# Altium PCB testboard_kit_tt.PcbDoc
Units mm, origin at the board's own origin, x right, y up, seen from the top; angles counter-clockwise.
Board outline 33.02 x 59.94 mm, 2 copper layers (Top Layer, Bottom Layer); 27 components, 7 nets, 91 pads, 413 vias.
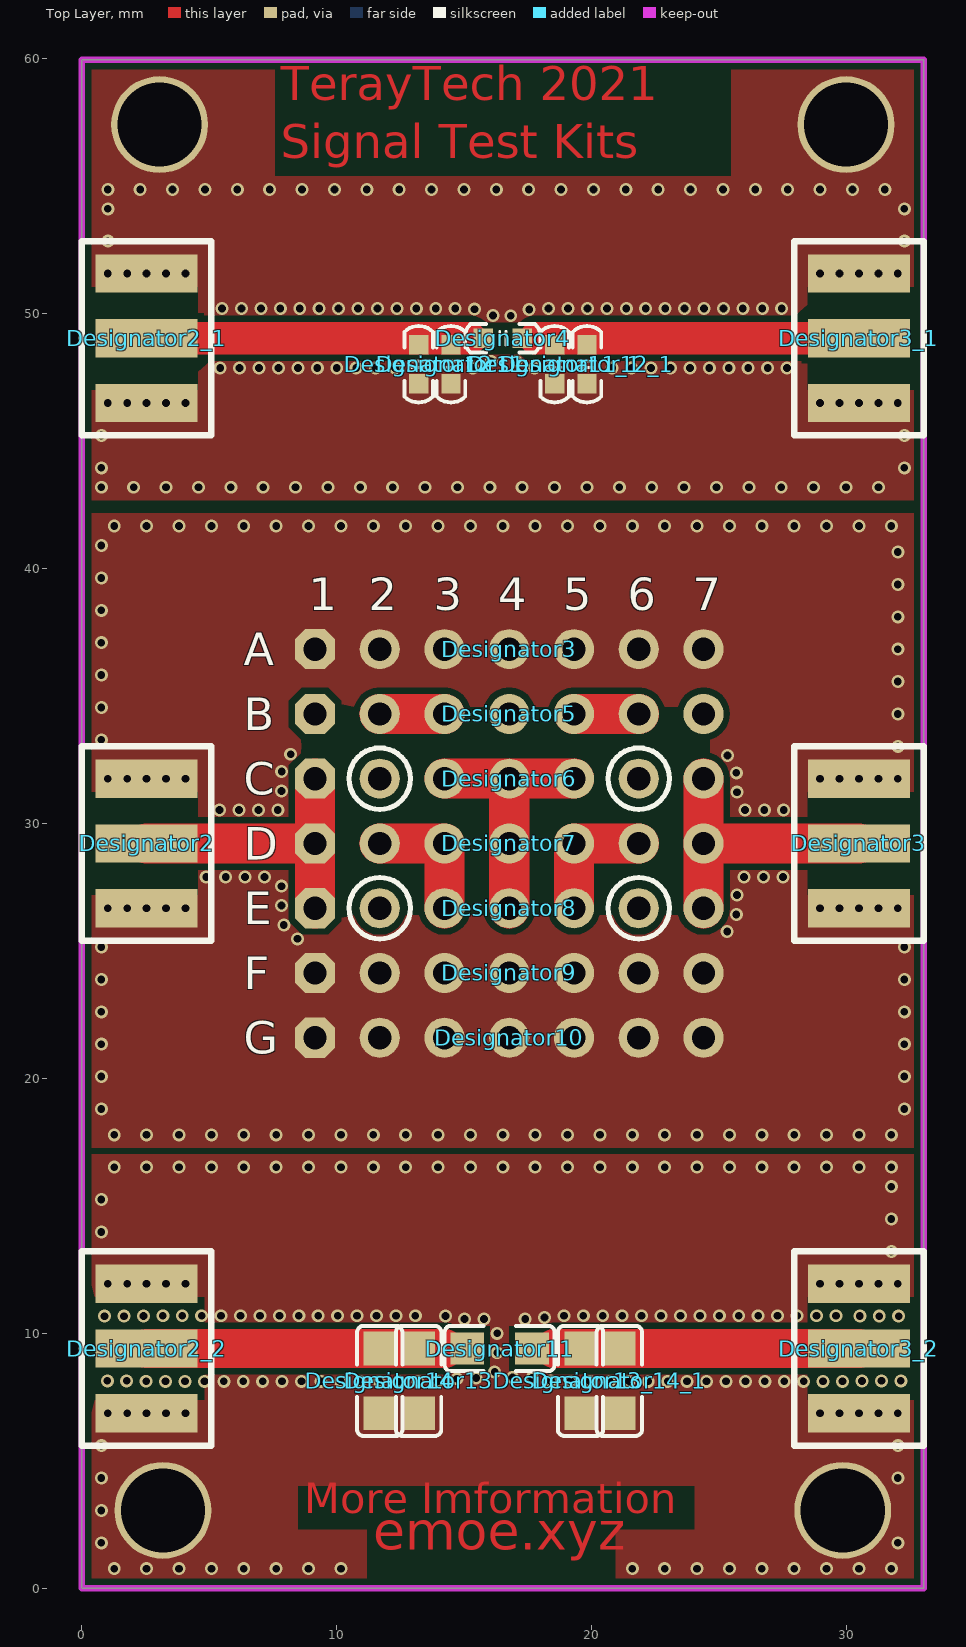
[diagram p0: Top Layer view]
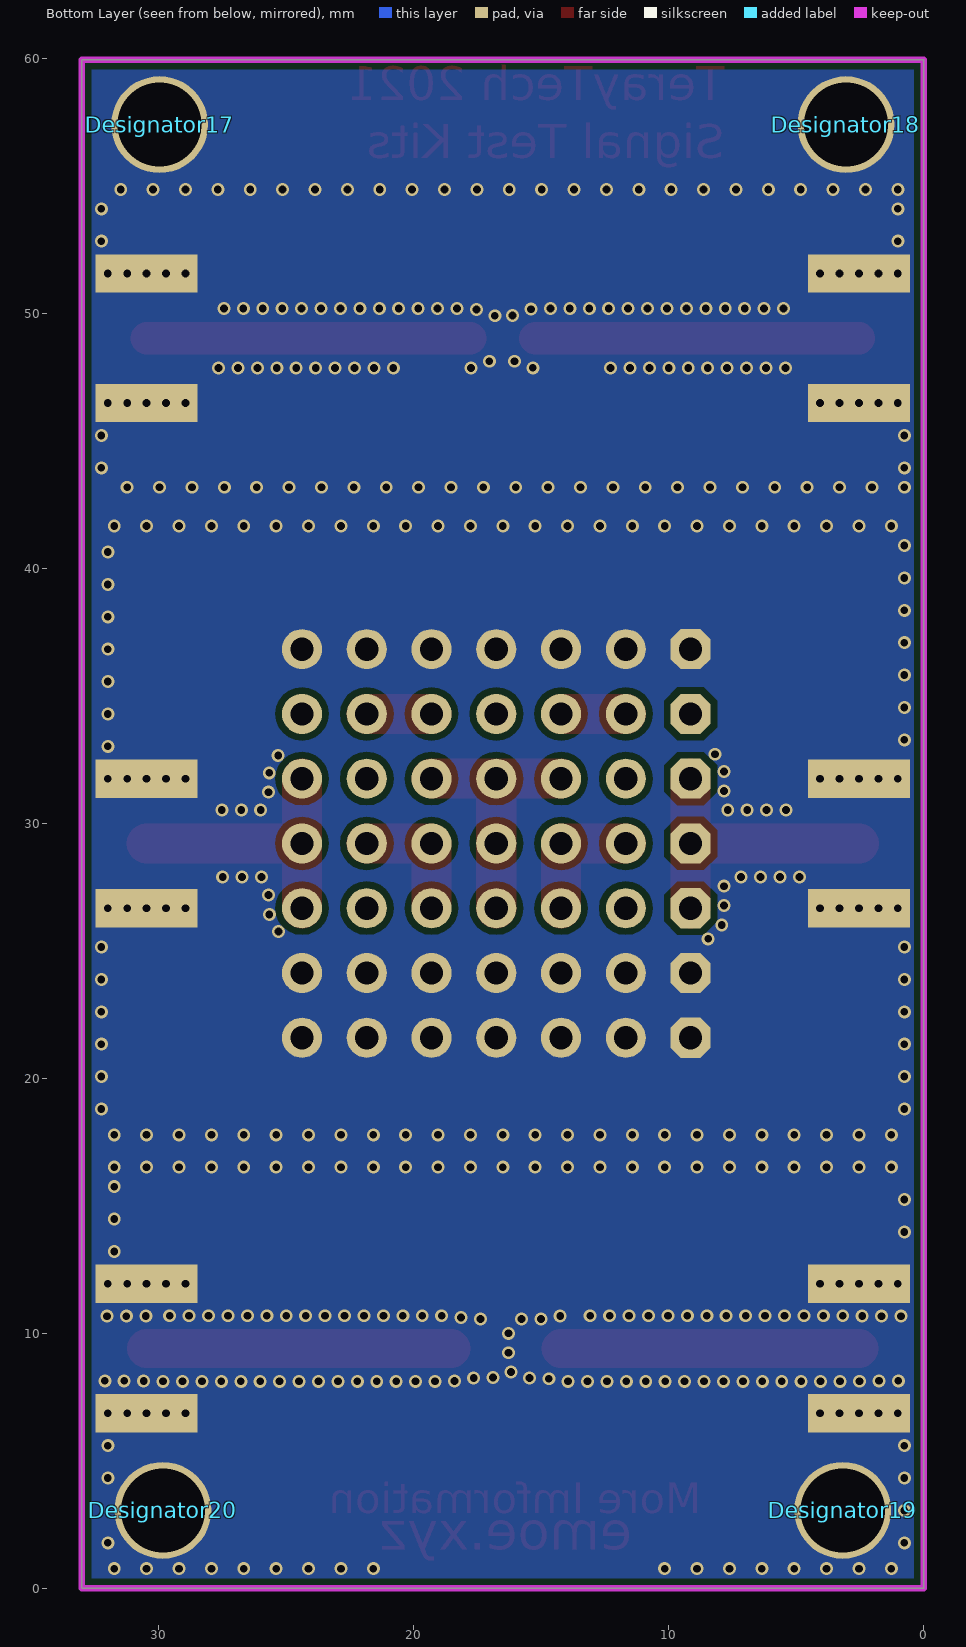
[diagram p1: Bottom Layer view, seen from below]
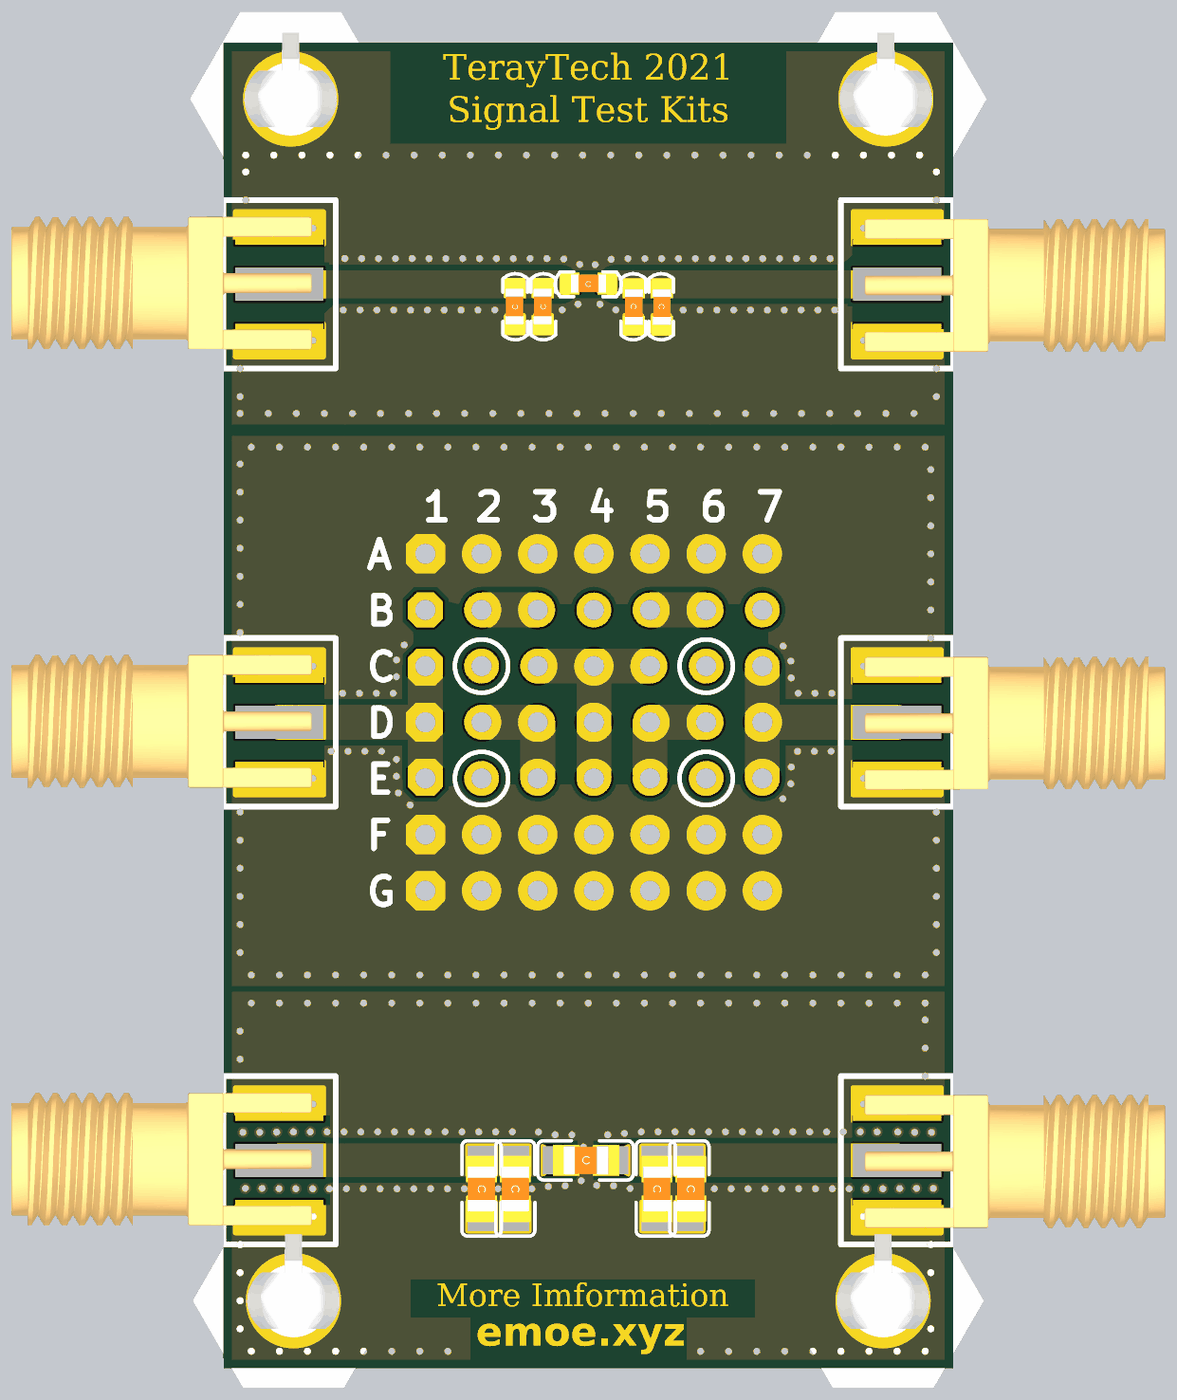
[diagram p2: 3D render of the assembled board from above, using the file's embedded part models]

## Layer stack, top to bottom
Top Solder: solder mask 0.0102, Solder Resist, Dk 3.5
Top Layer: signal copper 0.0356
Dielectric 1: dielectric 0.32, FR-4, Dk 4.8
Bottom Layer: signal copper 0.0356
Bottom Solder: solder mask 0.0102, Solder Resist, Dk 3.5

## Board outline
0,0 33.02,0 33.02,59.944 0,59.944

## Design rules (kind name [scope] priority, off if disabled: settings)
Clearance [All] p1: gap=0.254 ignorepadtopadclearanceinfootprint=FALSE except(0: Arc-Hole Track-Hole SMDPad-Hole THPad-Hole Via-Hole Fill-Hole Poly-Hole Region-Hole Text-Hole)
ComponentClearance [All] p1 off: gap=0.254 collisioncheckmode=3 verticalgap=0.254 showdistances=FALSE
PolygonConnect [All] p1: connectstyle=Direct reliefconductorwidth=0.254 reliefentries=4 polygonreliefangle="90 Angle" airgapwidth=0.254
RoutingVias [All] p1: holewidth=0.711 width=1.27 viastyle="Through Hole" minholewidth=0.305 minwidth=0.508 maxholewidth=0.711 maxwidth=1.27
SolderMaskExpansion [All] p1: expansion=0.102 istentingtop=FALSE
Width [All] p1: maxlimit=2.54 minlimit=0.254 preferedwidth=0.254 minimp=50.000000 maximp=50.000000 favimp=50.000000
29 further rules are at their usual default settings.

## Components (designator, comment, footprint, x,y, rotation, side; value= is the part's Value field where it differs from the comment)
Designator2 "Comment" SMA-2 2.54,29.21 r270 top locked
Designator2_1 "Comment" SMA-2 2.54,49.022 r270 top locked
Designator2_2 "Comment" SMA-2 2.54,9.398 r270 top locked
Designator3 "Comment" "header7 - smaller pad" 9.144,36.83 r0 top
Designator3 "Comment" SMA-2 30.48,29.21 r90 top locked
Designator3_1 "Comment" SMA-2 30.48,49.022 r90 top locked
Designator3_2 "Comment" SMA-2 30.48,9.398 r90 top locked
Designator4 "Comment" 0603_C 16.51,49.022 r0 top
Designator5 "Comment" "header7 - smaller pad" 9.144,34.29 r0 top
Designator6 "Comment" "header7 - smaller pad" 9.144,31.75 r0 top
Designator7 "Comment" "header7 - smaller pad" 9.144,29.21 r0 top
Designator8 "Comment" "header7 - smaller pad" 9.144,26.67 r0 top
Designator9 "Comment" "header7 - smaller pad" 9.144,24.13 r0 top
Designator10 "Comment" "header7 - smaller pad" 9.144,21.59 r0 top
Designator11 "Comment" 0805_c 15.24,9.398 r0 top
Designator11 "Comment" 0603_C 14.478,48.006 r90 top
Designator11_1 "Comment" 0603_C 18.542,48.006 r90 top
Designator12 "Comment" 0603_C 13.208,48.006 r90 top
Designator12_1 "Comment" 0603_C 19.812,48.006 r90 top
Designator13 "Comment" 0805_c 13.208,9.271 r270 top
Designator13_1 "Comment" 0805_c 19.558,9.271 r270 top
Designator14 "Comment" 0805_c 11.684,9.271 r270 top
Designator14_1 "Comment" 0805_c 21.082,9.271 r270 top
Designator17 "Comment" TCBS-6-01 29.972,57.404 r0 bottom
Designator18 "Comment" TCBS-6-01 3.048,57.404 r0 bottom
Designator19 "Comment" TCBS-6-01 3.175,3.048 r0 bottom
Designator20 "Comment" TCBS-6-01 29.845,3.048 r0 bottom

## Footprints (in the part's own frame and the unit in brackets; to place one, negate y for a bottom-side part, rotate by r counter-clockwise, add the part's x,y. Pads: shape width x height; smd on the part's side, far side on the other; paste and mask are expansions set on the pad)
0603_C [mil] "Capacitor"
  rect 30x30 smd: 1(-30,0) 2(30,0)
  silkscreen extent -59,-22 59,22, body extent -51,-18 52,21, height 35
0805_c [mil]
  rect 52x50 smd: 1(-5,0) 2(95,0)
  silkscreen extent -40,-35 130,35, body extent -13,-28 105,28, height 37
"header7 - smaller pad" [mm]
  oct 1.575x1.575 hole 0.914: 1(0,0)
  round 1.575 hole 0.914: 2(2.54,0) 3(5.08,0) 4(7.62,0) 5(10.16,0) 6(12.7,0) 7(15.24,0)
SMA-2 [mm]
  rect 1.5x4 all layers, no hole: 1(-2.54,0) 1(2.54,0)
  rect 1.5x4 smd: 2(0,0)
  silkscreen extent -3.81,-2.54 3.81,2.54, body extent -3.05,-12.13 2.95,1.47, height 3.2
TCBS-6-01 [mm] "Richco Plastics"
  round 3.8 hole 3.3 unplated mask+0.254: ""(0,0)
  body extent -4.56,-3.95 4.56,3.95, height 9.52

## Via types
v1: diameter 0.508, hole 0.305, Top Layer to Bottom Layer, tented both sides, 413 vias

## Nets (pads, with @x,y where several pads share a name; then routed paths per layer and width w, separated by ;. In a path a pad name is that pad's centre, name@x,y a point inside that pad or via, vN(x,y) a via of type N, cw(c..) or ccw(c..) an arc to the next point about the centre after c; other vN are vias at no path point)
GND: Designator2.1 Designator2_1.1 Designator2_2.1 Designator3.1 Designator3.2@11.684,36.83 Designator3.3 Designator3.4 Designator3.5 Designator3.6 Designator3.7 Designator3_1.1 Designator3_2.1 Designator9.1 Designator9.2 Designator9.3 Designator9.4 Designator9.5 Designator9.6 Designator9.7 Designator10.1 Designator10.2 Designator10.3 Designator10.4 Designator10.5 Designator10.6 Designator10.7 Designator11.1@14.478,47.244 Designator11_1.1 Designator12.1 Designator12_1.1 Designator13.2 Designator13_1.2 Designator14.2 Designator14_1.2 Designator17. Designator18. Designator19. Designator20.
  other v1: 1.27,0.762 2.54,0.762 3.81,0.762 5.08,0.762 6.35,0.762 7.62,0.762 8.89,0.762 10.16,0.762 21.59,0.762 22.86,0.762 24.13,0.762 25.4,0.762 26.67,0.762 27.94,0.762 29.21,0.762 30.48,0.762 31.75,0.762 0.762,1.778 32.004,1.778 0.762,3.048 0.762,4.318 32.004,4.318 0.762,5.588 32.004,5.588 1.016,6.858 1.778,6.858 2.54,6.858 3.302,6.858 4.064,6.858 28.956,6.858 29.718,6.858 30.48,6.858 31.242,6.858 32.004,6.858 3.283,8.111 4.045,8.111 4.807,8.111 5.569,8.111 6.331,8.111 7.093,8.111 7.855,8.111 8.617,8.111 9.379,8.111 10.141,8.111 10.903,8.111 11.665,8.111 12.427,8.111 13.189,8.111 13.951,8.111 19.167,8.111 19.929,8.111 20.691,8.111 21.453,8.111 22.215,8.111 22.977,8.111 23.739,8.111 24.501,8.111 25.263,8.111 26.025,8.111 26.787,8.111 27.549,8.111 28.311,8.111 29.073,8.111 29.835,8.111 0.997,8.13 1.759,8.13 2.521,8.115 18.405,8.125 30.597,8.122 31.359,8.13 32.121,8.13 14.706,8.212 15.467,8.245 16.891,8.265 17.653,8.245 16.193,8.477 16.291,9.232 16.291,9.994 15.009,10.551 15.771,10.551 17.389,10.551 18.148,10.62 0.889,10.666 1.651,10.666 2.413,10.672 14.258,10.678 30.514,10.678 31.275,10.666 32.037,10.666 3.175,10.685 3.937,10.685 4.699,10.685 5.461,10.685 6.223,10.685 6.985,10.685 7.747,10.685 8.509,10.685 9.271,10.685 10.033,10.685 10.795,10.685 11.557,10.685 12.319,10.685 13.081,10.685 18.908,10.685 19.67,10.685 20.432,10.685 21.194,10.685 21.956,10.685 22.718,10.685 23.48,10.685 24.242,10.685 25.004,10.685 25.766,10.685 26.528,10.685 27.29,10.685 28.052,10.685 28.814,10.685 29.576,10.685 1.016,11.938 1.778,11.938 2.54,11.938 3.302,11.938 4.064,11.938 28.956,11.938 29.718,11.938 30.48,11.938 31.242,11.938 32.004,11.938 31.75,13.208 0.762,13.97 31.75,14.478 0.762,15.24 31.75,15.748 1.27,16.51 2.54,16.51 3.81,16.51 5.08,16.51 6.35,16.51 7.62,16.51 8.89,16.51 10.16,16.51 11.43,16.51 12.7,16.51 13.97,16.51 15.24,16.51 16.51,16.51 17.78,16.51 19.05,16.51 20.32,16.51 21.59,16.51 22.86,16.51 24.13,16.51 25.4,16.51 26.67,16.51 27.94,16.51 29.21,16.51 30.48,16.51 31.75,16.51 1.27,17.78 2.54,17.78 3.81,17.78 5.08,17.78 6.35,17.78 7.62,17.78 8.89,17.78 10.16,17.78 11.43,17.78 12.7,17.78 13.97,17.78 15.24,17.78 16.51,17.78 17.78,17.78 19.05,17.78 20.32,17.78 21.59,17.78 22.86,17.78 24.13,17.78 25.4,17.78 26.67,17.78 27.94,17.78 29.21,17.78 30.48,17.78 31.75,17.78 0.762,18.796 32.258,18.796 0.762,20.066 32.258,20.066 0.762,21.336 32.258,21.336 0.762,22.606 32.258,22.606 0.762,23.876 32.258,23.876 0.762,25.146 32.258,25.146 8.454,25.469 25.312,25.754 7.921,26.014 25.669,26.427 1.016,26.67 1.778,26.67 2.54,26.67 3.302,26.67 4.064,26.67 28.956,26.67 29.718,26.67 30.48,26.67 31.242,26.67 32.004,26.67 7.832,26.771 25.696,27.188 7.832,27.533 4.877,27.898 5.639,27.898 6.401,27.898 7.163,27.898 25.974,27.898 26.736,27.898 27.498,27.898 5.4,30.522 6.162,30.522 6.924,30.522 7.686,30.522 26.005,30.522 26.767,30.522 27.529,30.522 25.696,31.219 7.832,31.27 1.016,31.75 1.778,31.75 2.54,31.75 3.302,31.75 4.064,31.75 28.956,31.75 29.718,31.75 30.48,31.75 31.242,31.75 32.004,31.75 25.67,31.98 7.839,32.032 25.322,32.658 8.189,32.709 32.004,33.02 0.762,33.274 32.004,34.29 0.762,34.544 32.004,35.56 0.762,35.814 32.004,36.83 0.762,37.084 32.004,38.1 0.762,38.354 32.004,39.37 0.762,39.624 32.004,40.64 0.762,40.894 1.27,41.656 2.54,41.656 3.81,41.656 5.08,41.656 6.35,41.656 7.62,41.656 8.89,41.656 10.16,41.656 11.43,41.656 12.7,41.656 13.97,41.656 15.24,41.656 16.51,41.656 17.78,41.656 19.05,41.656 20.32,41.656 21.59,41.656 22.86,41.656 24.13,41.656 25.4,41.656 26.67,41.656 27.94,41.656 29.21,41.656 30.48,41.656 31.75,41.656 0.762,43.18 2.032,43.18 3.302,43.18 4.572,43.18 5.842,43.18 7.112,43.18 8.382,43.18 9.652,43.18 10.922,43.18 12.192,43.18 13.462,43.18 14.732,43.18 16.002,43.18 17.272,43.18 18.542,43.18 19.812,43.18 21.082,43.18 22.352,43.18 23.622,43.18 24.892,43.18 26.162,43.18 27.432,43.18 28.702,43.18 29.972,43.18 31.242,43.18 0.762,43.942 32.258,43.942 0.762,45.212 32.258,45.212 1.016,46.482 1.778,46.482 2.54,46.482 3.302,46.482 4.064,46.482 28.956,46.482 29.718,46.482 30.48,46.482 31.242,46.482 32.004,46.482 5.425,47.857 6.187,47.857 6.949,47.857 7.711,47.857 8.473,47.857 9.235,47.857 9.997,47.857 10.759,47.857 11.521,47.857 12.283,47.857 17.754,47.862 20.802,47.857 21.564,47.857 22.326,47.857 23.088,47.857 23.85,47.857 24.612,47.857 25.374,47.857 26.136,47.857 26.898,47.857 27.66,47.857 15.331,47.867 16.048,48.123 17.039,48.123 16.125,49.921 16.823,49.907 17.545,50.151 15.403,50.165 5.498,50.187 6.26,50.187 7.022,50.187 7.784,50.187 8.546,50.187 9.308,50.187 10.07,50.187 10.832,50.187 11.594,50.187 12.356,50.187 13.118,50.187 13.88,50.187 14.642,50.187 18.306,50.187 19.068,50.187 19.83,50.187 20.592,50.187 21.354,50.187 22.116,50.187 22.878,50.187 23.64,50.187 24.402,50.187 25.164,50.187 25.926,50.187 26.688,50.187 27.45,50.187 1.016,51.562 1.778,51.562 2.54,51.562 3.302,51.562 4.064,51.562 28.956,51.562 29.718,51.562 30.48,51.562 31.242,51.562 32.004,51.562 1.016,52.832 32.258,52.832 1.016,54.102 32.258,54.102 1.016,54.864 2.286,54.864 3.556,54.864 4.826,54.864 6.096,54.864 7.366,54.864 8.636,54.864 9.906,54.864 11.176,54.864 12.446,54.864 13.716,54.864 14.986,54.864 16.256,54.864 17.526,54.864 18.796,54.864 20.066,54.864 21.336,54.864 22.606,54.864 23.876,54.864 25.146,54.864 26.416,54.864 27.686,54.864 28.956,54.864 30.226,54.864 31.496,54.864
S1: Designator2_2.2 Designator11.1@15.113,9.398 Designator13.1 Designator14.1 | length 11.7
  Top Layer w1.524: Designator2_2.2 14.224,9.398
S2: Designator3_2.2 Designator11.2@17.653,9.398 Designator13_1.1 Designator14_1.1 | length 11.9
  Top Layer w1.524: 18.542,9.398 Designator3_2.2
S3: Designator2.2 Designator6.1 Designator7.1 Designator8.1 | length 11.7
  Top Layer w1.575: Designator2.2 Designator7.1 ; Designator8.1 Designator7.1 ; Designator6.1 Designator7.1
S4: Designator3.2@30.48,29.21 Designator6.7 Designator7.7 Designator8.7 | length 11.2
  Top Layer w1.575: Designator8.7 Designator6.7 ; Designator7.7 Designator3.2@30.48,29.21
S5: Designator2_1.2 Designator4.1 Designator11.2@14.478,48.768 Designator12.2 | length 12.7
  Top Layer w1.27: Designator2_1.2 15.24,49.022
S6: Designator3_1.2 Designator4.2 Designator11_1.2 Designator12_1.2 | length 12.7
  Top Layer w1.27: 17.78,49.022 Designator3_1.2
pads on no net: Designator5.1 Designator5.2 Designator5.3 Designator5.4 Designator5.5 Designator5.6 Designator5.7 Designator6.2 Designator6.3 Designator6.4 Designator6.5 Designator6.6 Designator7.2 Designator7.3 Designator7.4 Designator7.5 Designator7.6 Designator8.2 Designator8.3 Designator8.4 Designator8.5 Designator8.6
copper on no net: | length 25.1
  Top Layer w1.575: 11.684,29.21 14.224,29.21 14.224,26.67 ; 11.684,34.29 14.224,34.29 ; 14.224,31.75 16.764,31.75 ; 16.764,26.67 16.764,31.75 ; 19.304,26.924 19.304,29.21 21.844,29.21 ; 19.304,31.75 16.764,31.75 ; 19.304,34.29 21.844,34.29

## Polygon pours and split planes (outlines as drawn)
GND on Top Layer "GND_L01_P000" (solid, remove dead copper, pour order 0): 0,42.164 33.02,42.164 33.02,17.272 0,17.272
GND on Top Layer "GND_L01_P002" (solid, pour order 2): 0,0 33.02,0 33.02,17.018 0,17.018
GND on Top Layer "GND_L01_P001" (solid, pour order 1): 0,42.672 33.02,42.672 33.02,59.944 0,59.944
GND on Bottom Layer "GND_L02_P003" (solid, pour order 3): 0,59.944 33.02,59.944 33.02,0 0,0

## Keep-outs
Keep-Out Layer:
  the board outline again, w0.254

## Other copper
Top Layer:
  pour cut-out: 32.766,7.366 32.766,11.43 28.448,11.43 28.448,7.366
  pour cut-out: 32.766,46.99 32.766,51.054 28.448,51.054 28.448,46.99
  pour cut-out: 0.254,51.054 0.254,46.99 4.572,46.99 4.572,51.054
  pour cut-out: 0.508,11.43 0.508,7.366 4.826,7.366 4.826,11.43
  pour cut-out: 32.766,27.178 32.766,31.242 28.448,31.242 28.448,27.178
  pour cut-out: 0.254,31.242 0.254,27.178 4.572,27.178 4.572,31.242
  text "TerayTech 2021 / Signal Test Kits" at 7.81,55.626 h2.29
  text "More Imformation" at 8.721,2.54 h2.03
  text "emoe.xyz" at 11.43,1.016 h2.54

## Silkscreen, mask and mechanical layers (free items; w line width, h text height)
Top Overlay:
  circle w0.203: c21.844,26.67 r1.205
  circle w0.203: c21.844,31.75 r1.205
  circle w0.203: c11.684,26.67 r1.205
  circle w0.203: c11.684,31.75 r1.205
  text "1" at 8.89,38.354 h1.27
  text "2" at 11.252,38.354 h1.27
  text "3" at 13.792,38.354 h1.27
  text "4" at 16.332,38.354 h1.27
  text "5" at 18.872,38.354 h1.27
  text "6" at 21.412,38.354 h1.27
  text "7" at 23.952,38.354 h1.27
  text "A" at 6.35,36.195 h1.27
  text "B" at 6.35,33.655 h1.27
  text "C" at 6.35,31.115 h1.27
  text "D" at 6.35,28.575 h1.27
  text "E" at 6.35,26.035 h1.27
  text "F" at 6.35,23.495 h1.27
  text "G" at 6.35,20.955 h1.27
Top Solder:
  text "TerayTech 2021 / Signal Test Kits" at 7.81,55.626 h2.29
  text "More Imformation" at 8.721,2.54 h2.03
  text "emoe.xyz" at 11.43,1.016 h2.54
Drill Drawing:
  text ".legend" at 47.371,1.429 h1.52